# Altium PCB PCB1.PcbDoc
Units mm, origin at the board's own origin, x right, y up, seen from the top; angles counter-clockwise.
Board outline 70 x 50 mm, 4 copper layers (Top Layer, Layer 2, Layer 3, Bottom Layer), stack 1.536 mm thick; 88 components, 67 nets, 367 pads, 54 vias.
Unrouted connection lines stored in the file: 76.
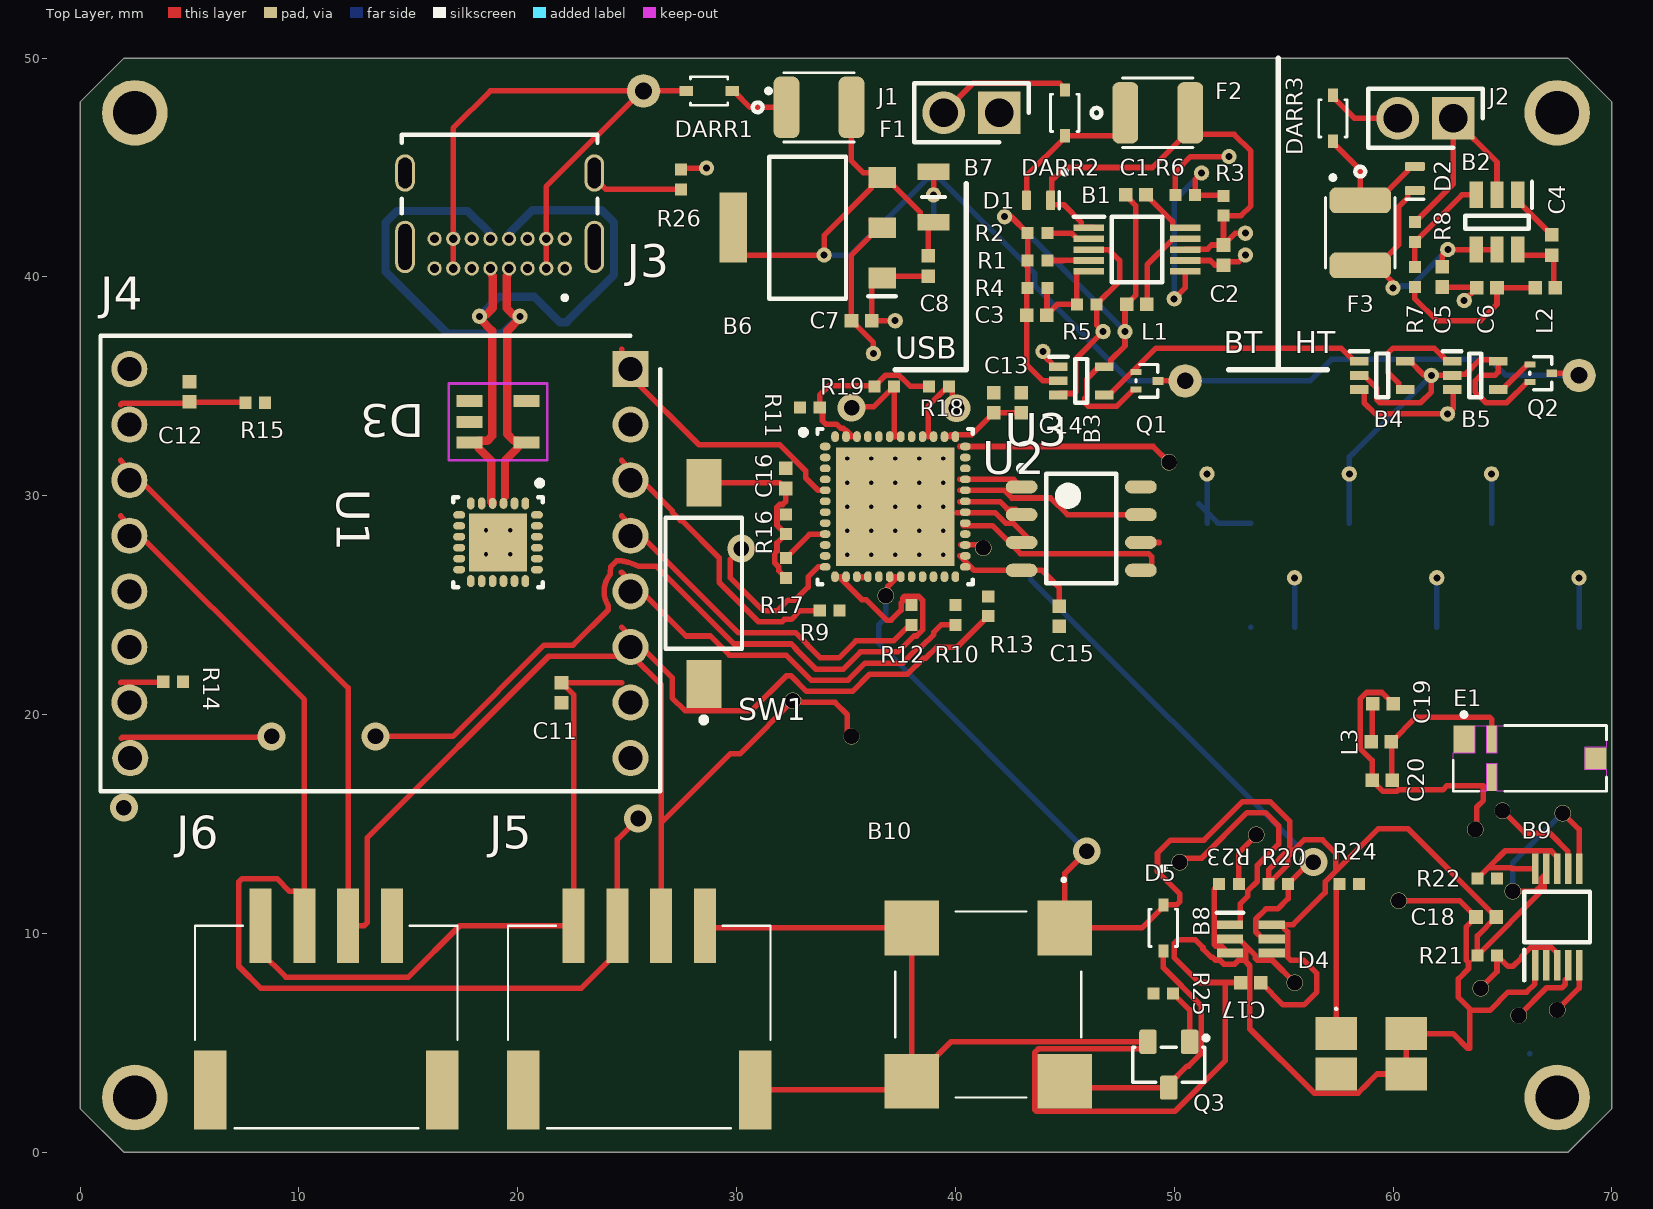
[diagram p0: Top Layer view]
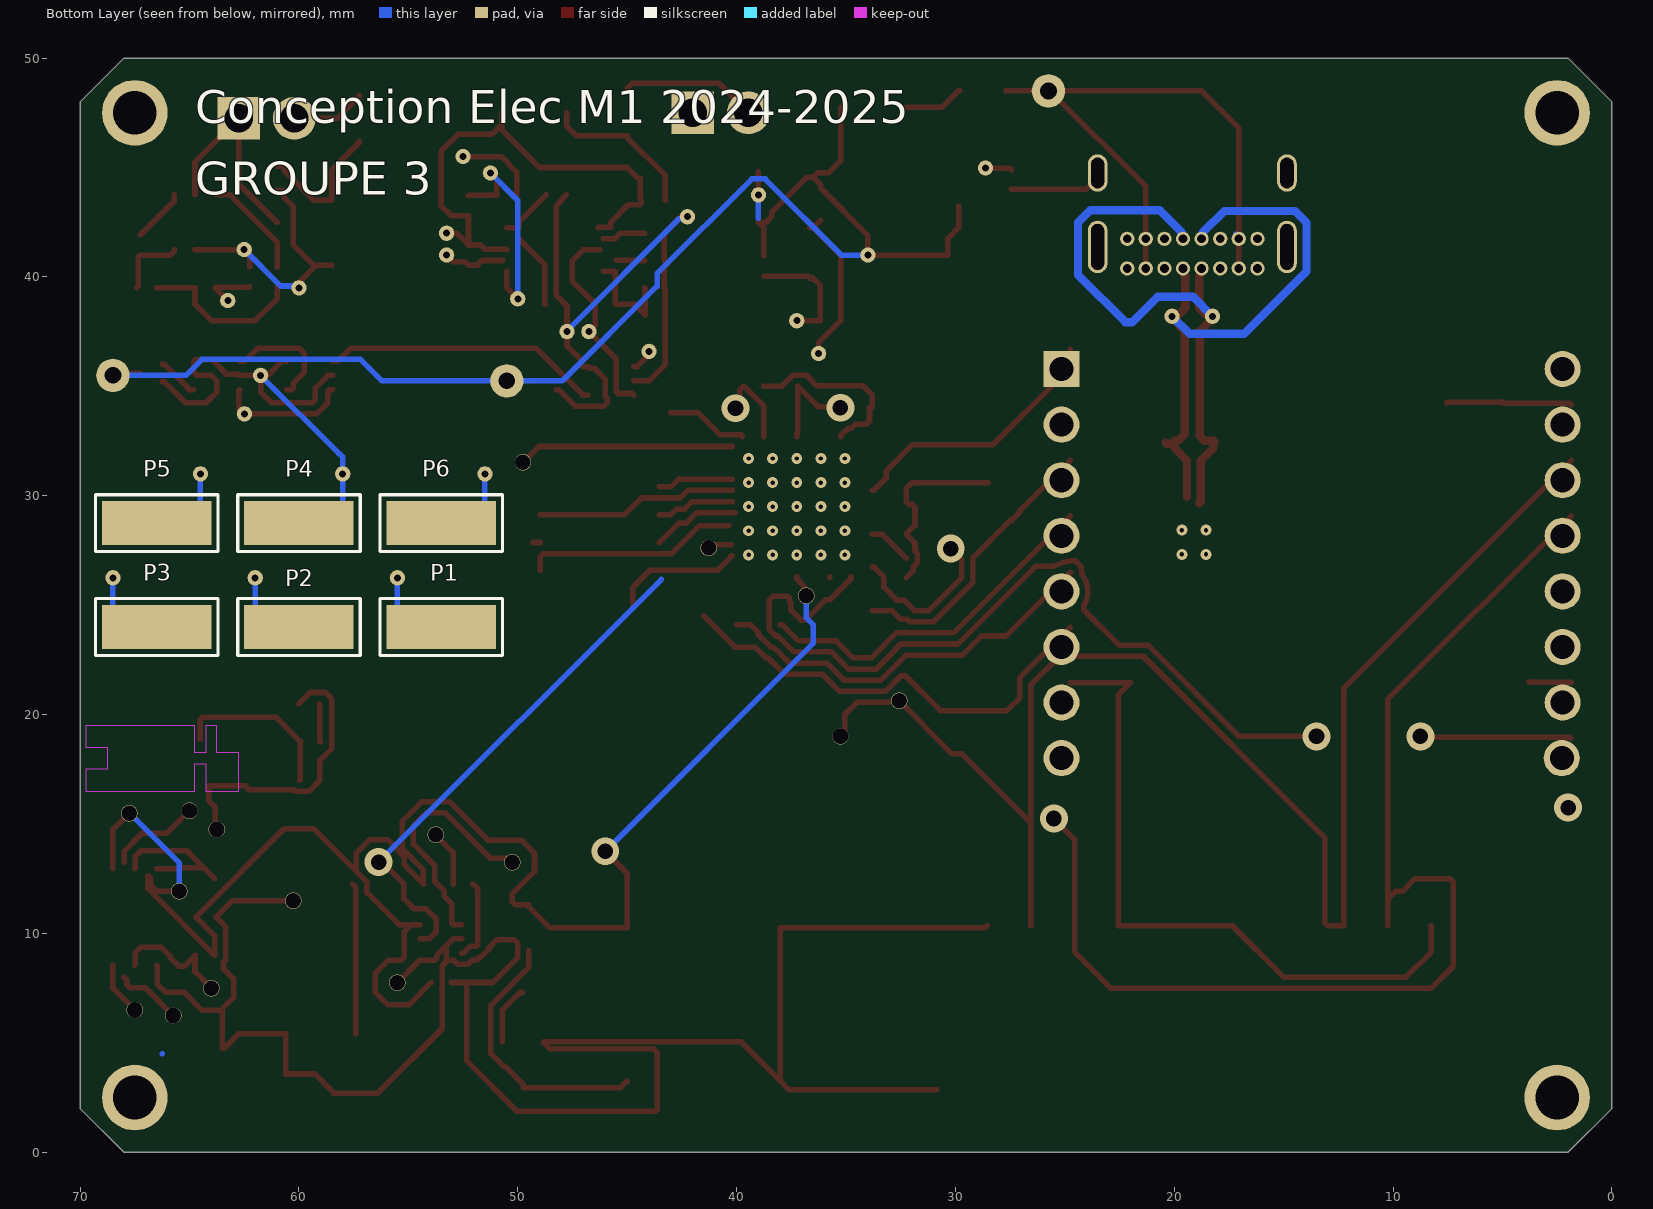
[diagram p1: Bottom Layer view, seen from below]
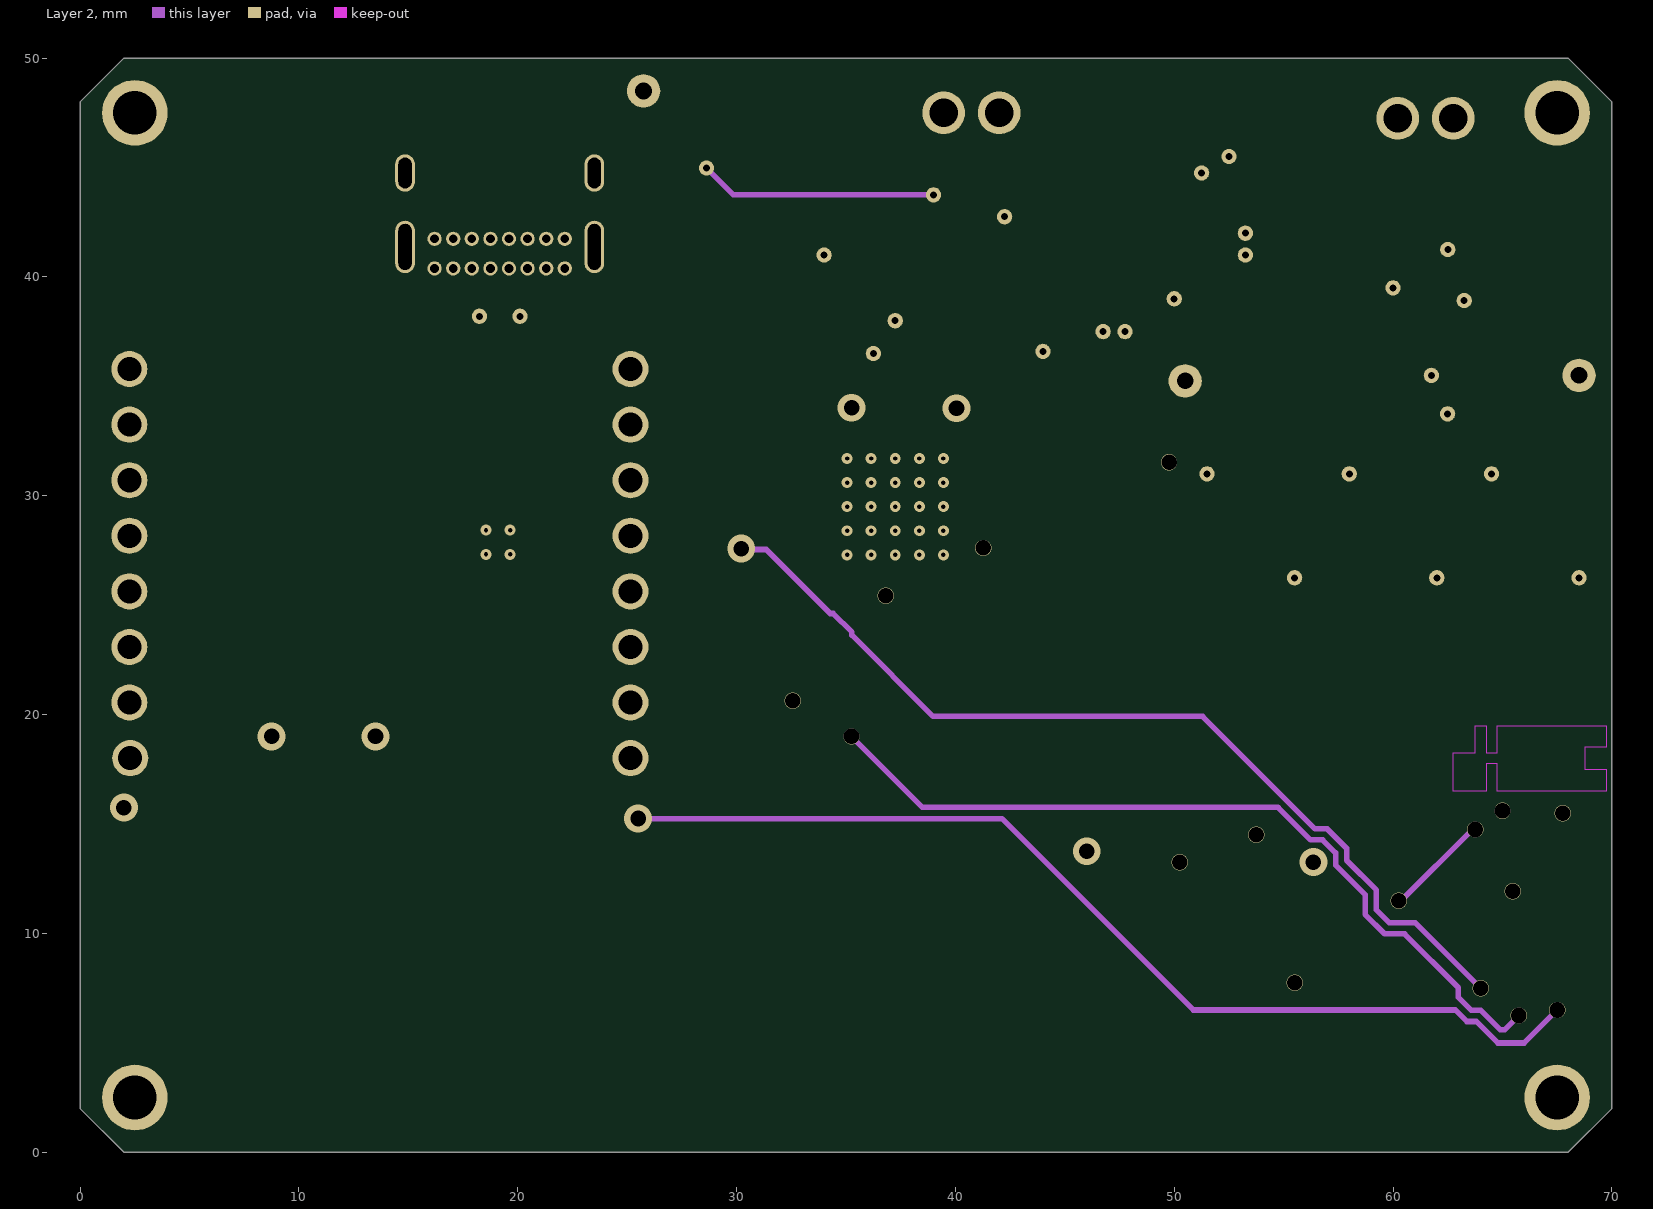
[diagram p2: Layer 2]
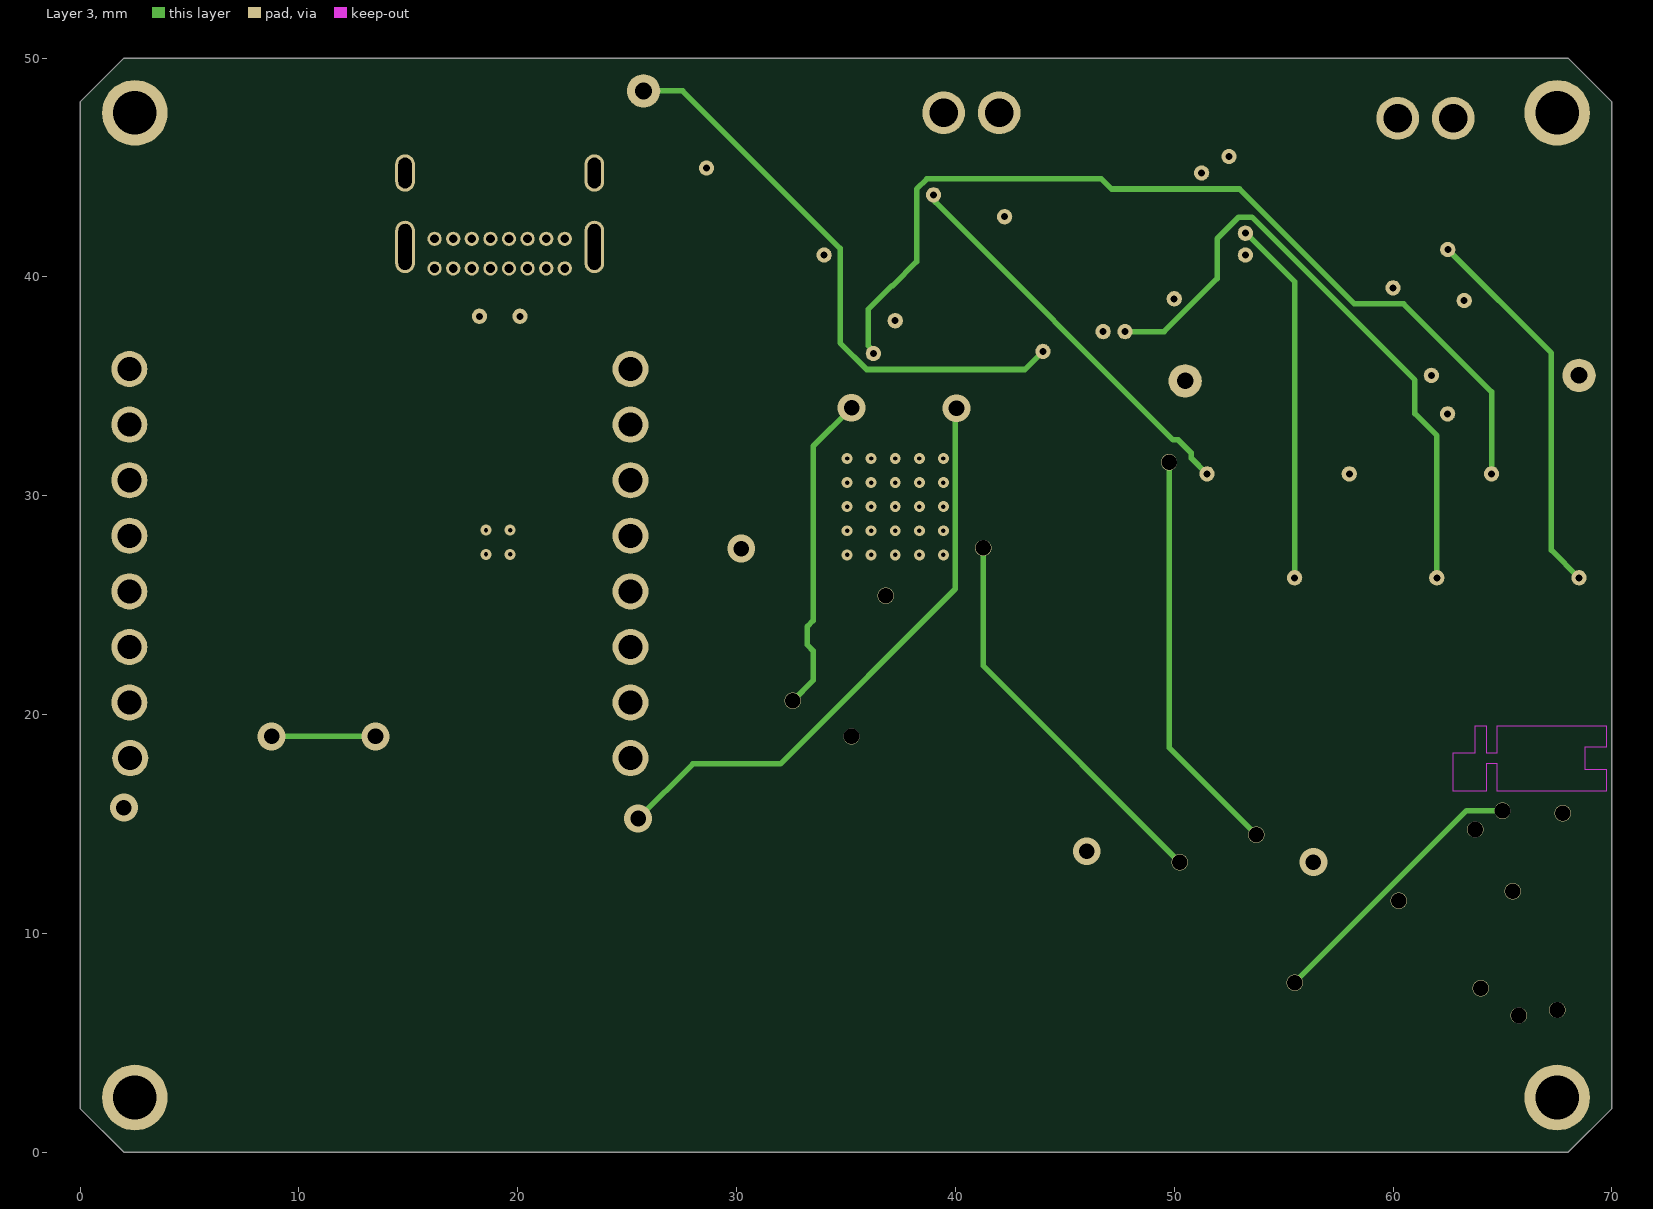
[diagram p3: Layer 3]
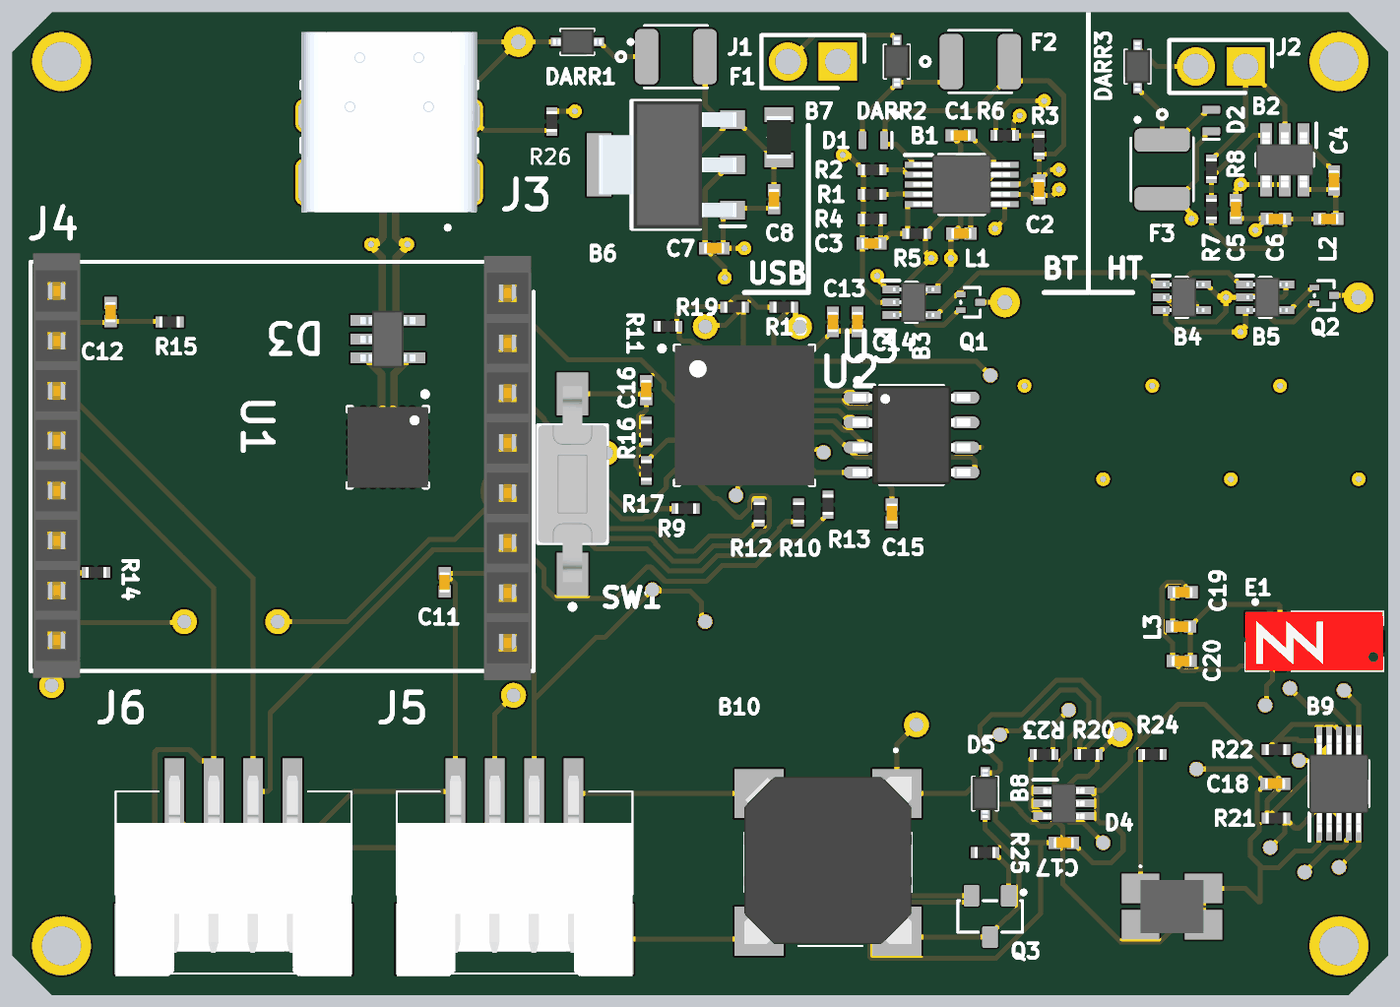
[diagram p4: 3D render of the assembled board from above, using the file's embedded part models]

## Layer stack, top to bottom
Top Solder: solder mask 0.0102, SM-001, Dk 3.5
Top Layer: signal copper 0.018
Dielectric 1: prepreg 0.36, FR-4, Dk 4.8
Layer 2: signal copper 0.035
Dielectric 2: core 0.71, FR-4, Dk 4.8
Layer 3: signal copper 0.035
Dielectric 3: prepreg 0.36, FR-4, Dk 4.8
Bottom Layer: signal copper 0.018
Bottom Solder: solder mask 0.0102, SM-001, Dk 3.5

## Board outline
0,2 2,0 68,0 70,2 70,48 68,50 2,50 0,48

## Design rules (kind name [scope] priority, off if disabled: settings)
Clearance [All] p1: gap=0.254 ignorepadtopadclearanceinfootprint=FALSE except(0: Arc-SMDPad Arc-Hole Track-SMDPad Track-Hole SMDPad-SMDPad SMDPad-Hole THPad-Hole Via-Hole Fill-Hole Poly-Hole Region-Hole Text-Hole)
DiffPairsRouting [All] p1: maxlimit=0.254 minlimit=0.254 mostfreqgap=0.254 toplayer_minwidth=0.381 toplayer_maxwidth=0.381 toplayer_prefwidth=0.381 midlayer1_minwidth=0.381 midlayer1_maxwidth=0.381 midlayer1_prefwidth=0.381 midlayer2_minwidth=0.381 midlayer2_maxwidth=0.381 midlayer2_prefwidth=0.381 bottomlayer_minwidth=0.381 bottomlayer_maxwidth=0.381 bottomlayer_prefwidth=0.381 maxuncoupledlength=12.7
PolygonConnect [All] p1: connectstyle=Relief reliefconductorwidth=0.254 reliefentries=4 polygonreliefangle="90 Angle" airgapwidth=0.254
RoutingVias [All] p1: holewidth=0.711 width=1.27 viastyle="Through Hole" minholewidth=0.711 minwidth=1.27 maxholewidth=0.711 maxwidth=1.27
SolderMaskExpansion [All] p1: expansion=0.102 istentingtop=FALSE
SupplyNets "Schematic Supply Nets_3" [InNet('5V_USB')] p1: voltage=0.000
SupplyNets "Schematic Supply Nets_2" [InNet('3V3_Reg')] p2: voltage=0.000
SupplyNets "Schematic Supply Nets_1" [InNet('Vin_USB')] p3: voltage=0.000
SupplyNets "Schematic Supply Nets" [InNet('GND')] p4: voltage=0.000
Width [All] p1: maxlimit=0.254 minlimit=0.254 preferedwidth=0.254
29 further rules are at their usual default settings.

## Classes and differential pairs
component class IHM: 0.75mm B8 B9 B10 C17 C18 C19 C20 D4 D5 E1 L3 Q3 R20 R21 R22 R23 R24 R25
component class ESP32_PICO_D4: C13 C14 C15 C16 R16 R17 R18 R19 SW1 U2 U3
component class Connecteurs: C11 C12 D3 J3 J4 J5 J6 R9 R10 R11 R12 R13 R14 R15 U1
component class Alimentation.SchDoc: B1 B2 B3 B4 B5 B6 B7 C1 C2 C3 C4 C5 C6 C7 C8 D1 D2 DARR1 DARR2 DARR3 F1 F2 F3 J1 J2 L1 L2 P1 P2 P3 P4 P5 P6 Q1 Q2 R1 R2 R3 R4 R5 R6 R7 R8 R26
differential pair USB: +USB_P -USB_N

## Components (designator, comment, footprint, x,y, rotation, side; value= is the part's Value field where it differs from the comment)
B1 "TPS62056DGSG4" SOP50P490X110-10N 48.3,41.25 r0 top
B2 "LMR50410Y3FQDBVRQ1" SOT95P280X145-6N 64.75,42.5 r270 top
B3 "MC74VHC1GT08DFT2G" SOT65P210X110-5N 45.75,35.25 r0 top
B4 "MC74VHC1GT08DFT2G" SOT65P210X110-5N 59.5,35.5 r0 top
B5 "MC74VHC1GT32DFT1G" SOT65P210X110-5N 63.75,35.5 r0 top
B6 "NCP1117IST33T3G" SOT230P700X180-4N 33.25,42.25 r180 top
B7 "NB12K00103JBB" RESC2212X50N 39,43.65 r90 top
B8 "TMP126DCKR" SOT65P210X110-6N 53.5,9.75 r0 top
B9 "INA237AIDGST" SOP50P490X110-10N 67.5,10.75 r90 top
B10 "CMT-8503-85B-SMT-TR" CMT850385BSMTTR 41.5,6.75 r180 top
C1 "22μF" CAPC1005X06N 48.25,43.75 r180 top
C2 "10μF" CAPC1005X06N 52.25,41 r270 top
C3 "6.8pF" CAPC1005X06N 43.71,38.25 r180 top
C4 "0.1μF" CAPC1005X06N 67.25,41.46 r270 top
C5 "2.2μF" CAPC1005X06N 62.25,40 r270 top
C6 "10μF" CAPC1005X06N 64.29,39.5 r180 top
C7 "10μF" CAPC1005X06N 35.71,38 r0 top
C8 "10μF" CAPC1005X06N 38.75,40.5 r270 top
C11 "0.1µF" CAPC1005X06N 22,21 r270 top
C12 "0.1µF" CAPC1005X06N 5,34.75 r90 top
C13 "10μF" CAPC1005X06N 41.75,34.25 r90 top
C14 "0.1μF" CAPC1005X06N 43,34.25 r90 top
C15 "0.1μF" CAPC1005X06N 44.75,24.5 r90 top
C16 "1μF" CAPC1005X06N 32.25,30.79 r90 top
C17 "0.1 µF" CAPC1005X06N 53.5,7.75 r0 top
C18 "100nF" CAPC1005X06N 64.25,10.75 r180 top
C19 "1.5 pF" CAPC1005X06N 59.54,20.5 r180 top
C20 "1.2 pF" CAPC1005X06N 59.5,17 r0 top
D1 "ESDA25P35-1U1M" STM-QFN1610 43.8,43.5 r180 top
D2 "ESDA25P35-1U1M" STM-QFN1610 61,44.5 r90 top
D3 "824011" 824011 19.1,33.375 r270 top
D4 "598-8610-207F" 5988610207F 59,4.5 r0 top
D5 "SD103AWS-7-F" SD103AWS-7-F 49.5,10.25 r270 top
DARR1 "SD103AWS-7-F" SD103AWS-7-F 28.75,48.5 r180 top
DARR2 "SD103AWS-7-F" SD103AWS-7-F 45,47.5 r90 top
DARR3 "SD103AWS-7-F" SD103AWS-7-F 57.25,47.25 r90 top
E1 "MN03-320" XCVR_NN03-320 66.25,18 r180 top
F1 "MICROSMD200LR-2" FUSC3225X100N 33.765,47.75 r0 top
F2 "MICROSMD200LR-2" FUSC3225X100N 49.25,47.5 r0 top
F3 "MICROSMD200LR-2" FUSC3225X100N 58.5,42.015 r270 top
J1 "61300211121" 61300211121 42,47.5 r180 top
J2 "61300211121" 61300211121 62.75,47.25 r180 top
J3 "Use" USB4085-GF-A 19.175,44.75 r180 top locked
J4 "825433-8" Connect-Mikronus 25.15,35.79 r270 top locked
J5 "114020164" 114020164 25.55,6.55 r0 top
J6 "114020164" 114020164 11.25,6.55 r0 top
L1 "10μH" LQPC1005X06N 45.496,35.956 r180 top
L2 "10μH" LQPC1005X06N 69.754,42.294 r0 top
L3 "1.8 nH" LQPC1005X06N 62.254,21.544 r0 top
P1 "Plage CMS 10x5" "Plage CMS 10x5" 53.5,24 r0 bottom
P2 "Plage CMS 10x5" "Plage CMS 10x5" 60,24 r0 bottom
P3 "Plage CMS 10x5" "Plage CMS 10x5" 66.5,24 r0 bottom
P4 "Plage CMS 10x5" "Plage CMS 10x5" 60,28.75 r0 bottom
P5 "Plage CMS 10x5" "Plage CMS 10x5" 66.5,28.75 r0 bottom
P6 "Plage CMS 10x5" "Plage CMS 10x5" 53.5,28.75 r0 bottom
Q1 "SI3139K-TP" SI3139K-TP 48.75,35.25 r270 top
Q2 "SI3139K-TP" SI3139K-TP 66.75,35.6 r270 top
Q3 "SS8050-G" SS8050-G 49.75,4 r180 top
R1 "1MΩ" RESC1005X06N 43.75,40.75 r0 top
R2 "1MΩ" RESC1005X06N 43.75,42 r0 top
R3 "10kΩ" RESC1005X06N 52.25,43.25 r90 top
R4 "820KΩ" RESC1005X06N 43.75,39.5 r0 top
R5 "91KΩ" RESC1005X06N 46,38.75 r0 top
R6 "10kΩ" RESC1005X06N 50.5,43.75 r180 top
R7 "88.7KΩ" RESC1005X06N 61,40 r90 top
R8 "22.1KΩ" RESC1005X06N 61,42.05 r90 top
R9 "100Ω" RESC1005X06N 34.25,24.75 r0 top
R10 "100Ω" RESC1005X06N 40,24.55 r90 top
R11 "2.4kΩ" RESC1005X06N 33.35,34.025 r0 top
R12 "100Ω" RESC1005X06N 38,24.55 r90 top
R13 "100Ω" RESC1005X06N 41.5,24.95 r90 top
R14 "2.4kΩ" RESC1005X06N 4.25,21.5 r180 top
R15 "2.4kΩ" RESC1005X06N 8,34.25 r180 top
R16 "10kΩ" RESC1005X06N 32.25,28.7 r90 top
R17 "0Ω" RESC1005X06N 32.25,26.7 r90 top
R18 "2.4kΩ" RESC1005X06N 39.25,35 r180 top
R19 "2.4kΩ" RESC1005X06N 36.75,35 r180 top
R20 "10K" RESC1005X06N 54.75,12.25 r180 top
R21 "10K" RESC1005X06N 64.3,9 r180 top
R22 "4k" RESC1005X06N 64.3,12.5 r180 top
R23 "10k" RESC1005X06N 52.5,12.25 r0 top
R24 "180" RESC1005X06N 58,12.25 r0 top
R25 "180" RESC1005X06N 49.5,7.25 r180 top
R26 "10 kΩ" RESC1005X06N 27.45,44.45 r270 top
SW1 "FSMSM" TECO-FSMSM-2_V 28.5,26 r90 top
U1 "CP2104-F03-GM" PQFN50P400X400X80_HS-25N 19.1,27.875 r270 top
U2 "ESP32-PICO-D4" PQFN50P700X700X104_HS-49N 37.25,29.5 r0 top
U3 "IS66WVS1M8BLL-104NLI" SOIC127P600X175-8N 45.75,28.5 r0 top

## Footprints (in the part's own frame and the unit in brackets; to place one, negate y for a bottom-side part, rotate by r counter-clockwise, add the part's x,y. Pads: shape width x height; smd on the part's side, far side on the other; paste and mask are expansions set on the pad)
824011 [mil] "Suppresseurs ESD / diodes TVS WE-TVS High Speed 5uA 5VDC 2+1"
  rect 21.65x47.24 smd: 1(-37.4,-51.18) 2(0,-51.18) 3(37.4,-51.18) 4(37.4,51.18) 5(-37.5,51)
  Top Layer keep-out lines w5: 68.9,-88.58 -68.9,-88.58 -68.9,88.58 68.9,88.58 68.9,-88.58
  body extent -57,-55 57,55, height 57
114020164 [mm]
  rect 1x3.4 smd: 1(-3,3.8) 2(-1,3.8) 3(1,3.8) 4(3,3.8)
  rect 1.5x3.6 smd: MP1(-5.3,-3.7) MP2(5.3,-3.7)
  silkscreen extent -6,-5.45 6,3.8, body extent -6,-5.59 6,4.6, height 5.2
5988610207F [mm]
  rect 1.9x1.5 smd: 1(-1.6,0.925) 2(1.6,0.925) 3(-1.6,-0.925) 4(1.6,-0.925)
  silkscreen extent -1.65,2 -1.55,2.1, body extent -1.6,-1.35 1.6,1.35, height 0.9
61300211121 [mm] "Embases et logements de câbles WR-PHD 2.54mm 2Pin T HT Header"
  rect 1.95x1.95 / inner round 1.95 / far side rect 1.95x1.95 hole 1.3: 1(0,0)
  round 1.95 hole 1.3: 2(2.54,0)
  silkscreen extent -1.35,-1.35 3.89,1.35
CAPC1005X06N [mm] "Chip Capacitor, 2-Leads, Body 1,00x0,50mm, IPC Medium Density"
  rect 0.62x0.62 smd: 1(-0.46,0) 2(0.46,0)
  body extent -0.53,-0.28 0.53,0.28, height 0.55
CMT850385BSMTTR [mm]
  rect 2.5x2.5 smd: 1(-3.5,-3.5) 4(-3.5,3.5) MP1(3.5,-3.5) MP2(3.5,3.5)
  silkscreen extent -4.25,-5.75 4.25,4.25, body extent -4.31,-4.35 4.31,4.15, height 3
Connect-Mikronus [mm]
  rect 1.65x1.65 / inner round 1.65 / far side rect 1.65x1.65 hole 1.1: 1(0,0)
  round 1.65 hole 1.1: 2(2.54,0) 3(5.08,0) 4(7.62,0) 5(10.16,0) 6(12.7,0) 7(15.24,0) 8(17.78,0) 9(17.78,-22.86) 10(15.24,-22.9) 11(12.7,-22.9) 12(10.16,-22.9) 13(7.62,-22.9) 14(5.08,-22.9) 15(2.54,-22.9) 16(0,-22.9)
  silkscreen extent -1.52,-24.22 19.3,1.37, body extent -1.95,-24.1 19.78,1.25, height 8.5
FUSC3225X100N [mm]
  rrect50% 1.18x2.81 smd: 1(-1.485,0) 2(1.485,0)
  silkscreen extent -3.02,-1.59 1.61,1.59
LQPC1005X06N [mm]
  rect 0.62x0.62 smd: 1(-3.254,-2.794) 2(-2.334,-2.794)
  body extent -3.32,-3.07 -2.27,-2.52, height 0.55
"Plage CMS 10x5" [mm] "Plage CMS 10x5"
  rect 5x2 smd paste-1 mask+0.15: 1(0,0)
  silkscreen extent -2.8,-1.3 2.8,1.3
PQFN50P400X400X80_HS-25N [mm] "PQFN, 24-Leads, Body 4,00x4,00mm, Pitch 0,50mm, Thermal Pad 2,65x2,65mm, IPC Medium Density"
  oval 0.55x0.35 smd: 1(-1.775,1.25) 2(-1.775,0.75) 5(-1.775,-0.75) 6(-1.775,-1.25) 13(1.775,-1.25) 14(1.775,-0.75) 15(1.775,-0.25) 16(1.775,0.25) 17(1.775,0.75) 18(1.775,1.25)
  oval 0.5x0.35 smd: 3(-1.775,0.25) 4(-1.775,-0.25)
  oval 0.35x0.55 smd: 7(-1.25,-1.775) 8(-0.75,-1.775) 9(-0.25,-1.775) 10(0.25,-1.775) 11(0.75,-1.775) 12(1.25,-1.775) 19(1.25,1.775) 20(0.75,1.775) 21(0.25,1.775) 22(-0.25,1.775) 23(-0.75,1.775) 24(-1.25,1.775)
  rect 2.65x2.65 smd: 25(0,0)
  silkscreen extent -2.82,-2.05 2.05,2.05, body extent -2.05,-2.05 2.05,2.05, height 0.8
PQFN50P700X700X104_HS-49N [mm] "PQFN, 48-Leads, Body 7,00x7,00mm, Pitch 0,50mm, Thermal Pad 5,40x5,40mm, IPC Medium Density"
  oval 0.5x0.35 smd: 1(-3.2,2.75) 2(-3.2,2.25) 3(-3.2,1.75) 4(-3.2,1.25) 5(-3.2,0.75) 6(-3.2,0.25) 7(-3.2,-0.25) 8(-3.2,-0.75) 9(-3.2,-1.25) 10(-3.2,-1.75) 11(-3.2,-2.25) 12(-3.2,-2.75) 25(3.2,-2.75) 26(3.2,-2.25) 27(3.2,-1.75) 28(3.2,-1.25) 29(3.2,-0.75) 30(3.2,-0.25) 31(3.2,0.25) 32(3.2,0.75) 33(3.2,1.25) 34(3.2,1.75) 35(3.2,2.25) 36(3.2,2.75)
  oval 0.35x0.5 smd: 13(-2.75,-3.2) 14(-2.25,-3.2) 15(-1.75,-3.2) 16(-1.25,-3.2) 17(-0.75,-3.2) 18(-0.25,-3.2) 19(0.25,-3.2) 20(0.75,-3.2) 21(1.25,-3.2) 22(1.75,-3.2) 23(2.25,-3.2) 24(2.75,-3.2) 37(2.75,3.2) 38(2.25,3.2) 39(1.75,3.2) 40(1.25,3.2) 41(0.75,3.2) 42(0.25,3.2) 43(-0.25,3.2) 44(-0.75,3.2) 45(-1.25,3.2) 46(-1.75,3.2) 47(-2.25,3.2) 48(-2.75,3.2)
  rect 5.4x5.4 smd: 49(0,0)
  silkscreen extent -4.32,-3.55 3.55,3.55, body extent -3.55,-3.55 3.55,3.55, height 1.04
RESC1005X06N [mm] "Chip Resistor, 2-Leads, Body 1,00x0,50mm, IPC Medium Density"
  rect 0.55x0.55 smd: 1(-0.45,0) 2(0.45,0)
  body extent -0.53,-0.28 0.53,0.28, height 0.55
RESC2212X50N [mm]
  rect 0.75x1.45 smd: 1(-1.15,0) 2(1.15,0)
  silkscreen extent 0,-0.53 0,0.53, body extent -1.07,-0.63 1.07,0.63, height 0.5
SD103AWS-7-F [mm]
  rect 0.6x0.46 smd: 1(-1.05,0) 2(1.05,0)
  silkscreen extent -2.81,-0.65 0.85,0.65, body extent -1.25,-0.65 1.25,0.65, height 1.2
SI3139K-TP [mm] "MOSFET P-Channel MOSFET"
  rect 0.28x0.5 smd paste+0 mask+0.075: 1(-0.4,-0.5) 2(0.4,-0.5)
  rect 0.36x0.5 smd paste+0 mask+0.075: 3(0,0.5)
  silkscreen extent -0.75,-0.5 0.75,0.5, body extent -0.6,-0.6 0.6,0.6, height 0.55
SOIC127P600X175-8N [mm] "SOIC, 8-Leads, Body 4,90x3,90mm, Pitch 1,27mm, IPC Medium Density"
  oval 1.45x0.6 smd: 1(-2.725,1.905) 2(-2.725,0.635) 3(-2.725,-0.635) 4(-2.725,-1.905) 5(2.725,-1.905) 6(2.725,-0.635) 7(2.725,0.635) 8(2.725,1.905)
  silkscreen extent -2.85,-2.5 1.6,2.88, body extent -3,-2.5 3,2.5, height 1.75
SOP50P490X110-10N [mm]
  rect 1.4x0.3 smd: 1(-2.2,1) 2(-2.2,0.5) 3(-2.2,0) 4(-2.2,-0.5) 5(-2.2,-1) 6(2.2,-1) 7(2.2,-0.5) 8(2.2,0) 9(2.2,0.5) 10(2.2,1)
  silkscreen extent -2.9,-1.5 1.15,1.5, body extent -2.46,-1.5 2.46,1.5, height 1.06
SOT65P210X110-5N [mm]
  rect 0.85x0.4 smd: 1(-1.05,0.65) 2(-1.05,0) 3(-1.05,-0.65) 4(1.05,-0.65) 5(1.05,0.65)
  silkscreen extent -1.48,-1 0.28,1.1, body extent -0.95,-1 1.15,1, height 1.1
SOT65P210X110-6N [mm]
  rect 1.2x0.4 smd: 1(-0.95,0.65) 2(-0.95,0) 3(-0.95,-0.65) 4(0.95,-0.65) 5(0.95,0) 6(0.95,0.65)
  silkscreen extent -1.55,1.2 -0.35,1.2, body extent -1.05,-1 1.05,1, height 1
SOT95P280X145-6N [mm]
  rect 1.2x0.6 smd: 1(-1.25,0.95) 2(-1.25,0) 3(-1.25,-0.95) 4(1.25,-0.95) 5(1.25,0) 6(1.25,0.95)
  silkscreen extent -1.85,-1.45 0.3,1.6, body extent -1.4,-1.45 1.4,1.45, height 1.2
SOT230P700X180-4N [mm]
  rect 1.25x0.95 smd: 1(-3.4,2.3) 2(-3.4,0) 3(-3.4,-2.3)
  rect 1.25x3.2 smd: 4(3.4,0)
  silkscreen extent -4.03,-3.25 1.75,3.25, body extent -3.6,-3.25 3.4,3.25, height 1.8
SS8050-G [mm]
  rrect25% 0.8x1.1 smd paste+0 mask+0.075: 1(-0.95,-1.05) 2(0.95,-1.05) 3(0,1.05)
  silkscreen extent -1.77,-1.3 1.65,0.8, body extent -1.5,-1.3 1.5,1.3, height 1.1
STM-QFN1610 [mm] "SMD, 2-Leads, Body 1.6x1mm"
  rrect25% 0.4x0.9 smd: 1(-0.55,0) 2(0.55,0)
  silkscreen extent -0.95,-0.4 -0.95,0.4, body extent -0.8,-0.5 0.8,0.5, height 0.6
TECO-FSMSM-2_V [mm] "SMD, 2-Leads, Body 6x3.5mm, Pitch 9.19mm"
  rect 2.2x1.6 smd: 1(-4.595,0)
  rect 2.18x1.6 smd: 2(4.595,0)
  silkscreen extent -6.37,-1.75 3,1.75, body extent -4.98,-1.75 4.98,1.75, height 4.4
USB4085-GF-A [mm]
  round 0.65 hole 0.4: A1(-2.975,4.36) A4(-2.125,4.36) A5(-1.275,4.36) A6(-0.425,4.36) A7(0.425,4.36) A8(1.275,4.36) A9(2.125,4.36) A12(2.975,4.36) B1(2.975,3.01) B4(2.125,3.01) B5(1.275,3.01) B6(0.425,3.01) B7(-0.425,3.01) B8(-1.275,3.01) B9(-2.125,3.01) B12(-2.975,3.01)
  oval 0.9x1.7 hole 0.6 slot 1.4 at 90 deg: S1(-4.325,0) S2(4.325,0)
  oval 0.9x2.4 hole 0.6 slot 2.1 at 90 deg: S3(-4.325,3.38) S4(4.325,3.38)
  silkscreen extent -4.47,-1.74 4.47,5.8, body extent -4.47,-4.25 4.47,4.92, height 3.46
XCVR_NN03-320 [mm]
  rect 1x1 smd: 1(-3,0)
  rect 0.5x1.25 smd: 2(1.75,-0.875) 3(1.75,0.875)
  rect 1x1.25 smd: 4(3,-0.875)
  Keep-Out Layer region: 3.5,-0.25 2.5,-0.25 2.5,-1.5 2,-1.5 2,-0.25 1.5,-0.25 1.5,-1.5 -3.5,-1.5 -3.5,-0.5 -2.5,-0.5 -2.5,0.5 -3.5,0.5 -3.5,1.5 1.5,1.5 1.5,0.25 2,0.25 2,1.5 3.5,1.5
  silkscreen extent -3.5,-2.1 3.5,1.5, body extent -3.5,-1.5 3.5,1.5, height 2.02

## Part data
B1: "TEXAS INSTRUMENTS - TPS62056DGSG4 - Synchronous Buck (Step Down) Switching Regulator, Fixed, 2.7V-10Vin, 3.3V/0.8A out, 850kHz, VSSOP-10", Manufacturer_Name="Texas Instruments", Mouser Part Number=595-TPS62056DGSG4, Manufacturer_Part_Number=TPS62056DGSG4
B2: "Régulateurs de tension de commutation Automotive qualified SIMPLE SWITCHER 4-V to 36-V, 1-A synchronous step-down converter 6-SOT-23 -40 to 150", Manufacturer_Name="Texas Instruments", Mouser Part Number=595-R50410Y3FQDBVRQ1, Manufacturer_Part_Number=LMR50410Y3FQDBVRQ1
B3 B4: "Single 2-Input AND Gate, TTL Level", Manufacturer_Name=onsemi, Manufacturer_Part_Number=MC74VHC1GT08DFT2G
B5: "Single 2-Input OR Gate, TTL Level", Manufacturer_Name=onsemi, Mouser Part Number=863-C74VHC1GT32DFT1G, Manufacturer_Part_Number=MC74VHC1GT32DFT1G
B6: "Linear Voltage Regulator IC Positive Fixed 1 Output 1A SOT-223", Parameter 1=onsemi, Parameter 2=NCP1117IST33T3G, Parameter 3=863-NCP1117IST33T3G
B7: "NTC SMD Thermistor, NB12K, 10K, 5% AVX 10k 0805 Protection NTC Thermistor, 5s, 2 x 1.25 x 1.3mm", Manufacturer_Name="Kyocera AVX", Mouser Part Number=581-NB12K00103JBB, Arrow Part Number=NB12K00103JBB, Arrow Price/Stock=https://www.arrow.com/en/products/nb12k00103jbb/avx, Datasheet Link=https://datasheet.datasheetarchive.com/originals/distributors/Datasheets-DGA6/551314.pdf, Geometry.Height=0.5mm, Manufacturer_Part_Number=NB12K00103JBB, Mouser Price/Stock=https://www.mouser.co.uk/ProductDetail/AVX/NB12K00103JBB/?qs=4%252B6%252BTdINQeDPvI%252BQUQjJ3Q%3D%3D
B8: "Board Mount Temperature Sensors +/-0.25 C SPI temperature sensor with 175 C operation, CRC and slew-rate alert", Manufacturer_Name="Texas Instruments", Mouser Part Number=595-TMP126DCKR, Manufacturer_Part_Number=TMP126DCKR
B9: "Current Sense Amplifiers 85-V, 16-bit, I2C output current/voltage/power monitor with alert 10-VSSOP -40 to 125", Manufacturer_Name="Texas Instruments", Mouser Part Number=595-INA237AIDGST, Manufacturer_Part_Number=INA237AIDGST
B10: "Speakers & Transducers buzzer, 8.5 mm, 3 mm deep, M, 3.6 V, 85 dB, Surface Mount (SMT), Audio Transducer", Manufacturer_Name="Same Sky", Mouser Part Number=490-CMT-850385BSMTTR, Manufacturer_Part_Number=CMT-8503-85B-SMT-TR
C1 C2 C3 C4 C5 C6 C7 C8 C11 C12 C13 C14 C15 C16 C17 C18 C19 C20: library part Capacitor
D1 D2: library part CMP-004-00023-3, "TVS DIODE 22V 41V 1610", Case/Package="QFN1610 (0603)", Max Surge Current=35A, Peak Inverse Voltage=23.3V, Mounting Technology=SMT, Pins=2, RoHS Compliant=Yes
D3: "TVS Diode Array WE-TVS, High Speed Series  - Low capazity - No leakage current - Low clamping voltage - high ESD voltage protection  -- USB 1.0 - 2.0"
D4: "Standard LEDs - SMD Red/Green WC 80/50mcd 645/570nm", Manufacturer_Name=Dialight, Mouser Part Number=645-598-8610-207F, Arrow Part Number=598-8610-207F, Arrow Price/Stock=https://www.arrow.com/en/products/598-8610-207f/dialight?region=nac, Datasheet Link=https://media.digikey.com/pdf/Data%20Sheets/Dialight%20PDFs/598%20Series%201210%20Pkg%20Bi-Color.pdf, Geometry.Height=0.8mm, Manufacturer_Part_Number=598-8610-207F, Mouser Price/Stock=https://www.mouser.co.uk/ProductDetail/Dialight/598-8610-207F?qs=7JStj%2FjQ2SFuCjosqwklHQ%3D%3D
D5 DARR1 DARR2 DARR3: "Diode Array 3 Independent Schottky 40V 175mA Surface Mount 6-TSSOP, SC-88, SOT-363"
E1: library part NN03-320, "Dual port antenna booster for GNSS, Bluetooth, 5G and UWB (1561 - 1606MHz, 2400 - 2500MHz, 3400 - 3800MHz, 3100 - 4800MHz and 6000 - 10600 MHz), signal booster", Manufacturer_Name=Ignion, Mouser Part Number=128-NN03-320, Manufacturer_Part_Number=NN03-320
F1 F2 F3: library part CMP-011-000001-1, "Polymeric PTC Resettable Fuse 6V 2A Ih Surface Mount 1210 _3225 Metric_, Concave", Package="1210 TE Connectivity", Availability=Unavailable, Component Type=Standard, Design Item ID=MICROSMD200LR-2, MF="Littelfuse Inc.", MP=MICROSMD200LR-2, Pin Count=2, Price=None, SnapEDA_Link=https://www.snapeda.com/parts/MICROSMD200LR-2/Littelfuse%20Inc./view-part/2874530/?ref=snap, Source=SnapEDAsch.SchLib
J1 J2: "WURTH ELEKTRONIK - 61300211121 - HEADER, 2.54MM, PIN, THT, VERTICAL, 2WAY"
J3: library part USB4085-GF-A, "Connecteurs USB USB Type C, 2.0, Rec, TH , G/F, RA , Top Mnt, T & R"
J4: library part Connect-Mikrobus, "Headers & Wire Housings 8P double for connection mikrobus", Manufacturer_Name="TE Connectivity", Mouser Part Number=571-825433-8, Manufacturer_Part_Number=825433-8
J5 J6: "Seeed Studio Accessories Grove Female Header - SMD-4P-2.0mm-90D-20Pcs", Manufacturer_Name="Seeed Studio", Mouser Part Number=713-114020164, Manufacturer_Part_Number=114020164
L1 L2 L3: library part Bobine
P1 P2 P3 P4 P5 P6: "Plage de report CMS 10x5mm", Footprint_statut=ok, PN=L30
Q1 Q2: "MOSFET P-Channel MOSFET"
Q3: "Bipolar Transistors - BJT NPN TRANSISTOR 1.5A 40V"
R1 R2 R3 R4 R5 R6 R7 R8 R9 R10 R11 R12 R13 R14 R15 R16 R17 R18 R19 R20 R21 R22 R23 R24 R25 R26: library part Resistor
SW1: library part CMP-2000-07511-1, "FSMSM Push Button Switch, 50 mA, -35 to 85 degC, 2-Pin SMD, RoHS, Bulk", Case\/Package=SMD/SMT, Contact Current Rating=50mA, Contact Resistance=100mOhm, Manufacturer="TE Connectivity", Max Operating Temperature=85degC, Max Voltage Rating (DC)=12V, Min Operating Temperature=-35degC, Operating Force=180gf, Package Description="2-Pin Surface Mount Device, Body 6 x 3.5 mm, Pitch 9.19 mm", Package Quantity=1000, Voltage Rating (DC)=24V, Actuator Length=1.07mm, Actuator Material=Polyamide, Contact Material=Brass, Contact Plating=Silver, Current Rating=50mA, Datasheet URL=http://www.te.com/commerce/DocumentDelivery/DDEController?Action=showdoc&DocId=Customer+Drawing%7F1437566-3%7FC2%7Fpdf%7FEnglish%7FENG_CD_1437566-3_C2_1437566_3_1_c.dwg.pdf%7F1437566-3, Datasheet Version="Rev. C2, 08/2014", Electrical Life=20000Cycles, ELV=Compliant, Illumination Type=Illuminated, Lead Free=LeadFree, Manufacturer URL=http://www.te.com/, Mechanical Life=20000Cycles, Mount=SurfaceMount, Mounting Technology=SurfaceMount, Orientation=Straight, Package Reference=FSMSM, Packaging=LoosePiece, REACH SVHC=Unknown, RoHSCompliant=true, Switch Travel=0.25mm, Termination=GullWing, Throw Configuration=SPST
U1: library part USBBridge, "USB Bridge, USB to UART USB 2.0 UART Interface 24-QFN (4x4)", Manufacturer 1="Silicon Labs", Manufacturer Part Number 1=CP2104-F03-GM, Supplier 1="Arrow Electronics", Supplier Part Number 1=CP2104-F03-GM
U2: library part ESP32, "Système RF sur puce - SoC SIP module ESP32 with 4MByte Flash, Dual Core MCU, Wi-Fi & Bluetooth Combo, LGA48-pin, 7*7mm", Manufacturer 1="Espressif Systems", Supplier Part Number 1=1904-1029-1-ND, Manufacturer Part Number 1=ESP32-PICO-D4, Supplier 1=Digi-Key
U3: library part SRAM, "SRAM 8Mb, SerialRAM, 2.7V-3.6V, 104MHz, 8 pin SOIC 150 mil, RoHS", Manufacturer 1=ISSI, Supplier Part Number 1=706-IS66WVS1M8BLL-104NLI-ND, Manufactuer Part Number 1=IS66WVS1M8BLL-104NLI, Supplier 1=Digi-Key

## Free pads (board coordinates)
  round 3 hole 2: 19(2.5,2.5) 19(2.5,47.5) 19(67.5,2.5) 19(67.5,47.5)
  round 1.524 hole 0.762: 20(25.75,48.5) 27(50.5,35.25) 28(68.5,35.5)
  round 0.7 hole 0.32: 26(18.25,38.2) 26(20.1,38.2) 26(28.625,44.975) 26(34,41) 26(36.25,36.5) 26(37.25,38) 26(39,43.75) 26(42.25,42.75) 26(44,36.597) 26(46.75,37.5) 26(47.75,37.5) 26(50,39) 26(51.25,44.75) 26(51.5,31) 26(52.5,45.5) 26(53.25,41) 26(53.25,42) 26(55.5,26.25) 26(58,31) 26(60,39.5) 26(61.75,35.5) 26(62,26.25) 26(62.492,33.742) 26(62.5,41.25) 26(63.25,38.92) 26(64.5,31) 26(68.5,26.25)

## Via types
v1: diameter 0.5, hole 0.2, Top Layer to Bottom Layer, 29 vias
v2: diameter 0.75, hole 0.711, Top Layer to Bottom Layer, 16 vias
v3: diameter 1.27, hole 0.711, Top Layer to Bottom Layer, 9 vias

## Nets (pads, with @x,y where several pads share a name; then routed paths per layer and width w, separated by ;. In a path a pad name is that pad's centre, name@x,y a point inside that pad or via, vN(x,y) a via of type N, cw(c..) or ccw(c..) an arc to the next point about the centre after c; other vN are vias at no path point)
3V3_Reg: B8.6 B9.6 B9.9 B10.1 C11.1 C13.1 C14.1 C17.2 C18.1 D5.1 J4.7 J5.1 J6.1 R11.2 R16.2 R18.2 R19.2 R20.2 R21.2 R22.1 U2.1 U2.3 U2.4 U2.19 U2.37 U2.43 U2.46 | length 125.8
  Top Layer w0.254: J6.1 8.25,9.15 9.4,8 15,8 17.35,10.35 J5.1 22.55,20.91 C11.1 24.75,21.46 ; R11.2 33.8,34.6 34.234,35.034 36.266,35.034 R19.2 36.808,35.508 37.41,35.508 37.516,35.402 37.536,35.402 37.938,35 R18.2@38.75,35 ; R11.2@33.926,34.025 33.926,33.424 34.075,33.275 34.564,33.275 34.762,33.077 34.875,33.077 34.95,33.002 34.997,33.002 35.25,32.749 35.25,32.7 ; v2(36.818,25.424) 36.913,25.519 36.913,25.862 37.25,26.199 37.25,26.3 ; 39.75,32.7 39.75,32.749 39.794,32.793 40.753,32.793 C13.1 C14.1 ; v3(46,13.75) 45,12.75 B10.1 48.52,10.25 49.5,11.23 D5.1 50.111,11.3 50.26,11.449 50.26,11.803 49.234,12.829 49.234,13.671 49.829,14.266 51.361,14.266 53.119,16.024 54.381,16.024 55.274,15.131 55.274,13.869 54.311,12.906 R20.2@54.311,12.261 ; C17.2 54.976,6.734 55.921,6.734 56.516,7.329 56.516,8.171 55.921,8.766 55.326,8.766 55.177,8.915 55.177,10.073 B8.6@54.85,10.4 ; R20.2 R20.2@54.311,12.261 ; B8.6 B8.6@54.85,10.4 ; v2(65.461,11.934) 66.514,11.934 66.777,12.197 66.777,12.509 66.898,12.629 66.898,12.048 R21.2 63.85,9.89 C18.1 60.67,14.79 59.329,14.79 57.375,12.836 ; v2(67.75,15.5) 68.5,14.75 B9.6 ; R20.2@54.311,12.261 55.193,13.143 55.193,13.528 55.939,14.273 56.78,14.273 57.375,13.678 57.375,12.836 ; B8.6@54.85,10.4 55.431,10.4 56.892,11.861 56.892,12.353 57.375,12.836
  Bottom Layer w0.254: v2(36.818,25.424) 36.818,24.429 36.5,24.111 36.5,23.25 v3(46,13.75) ; v2(65.461,11.934) 65.461,13.211 v2(67.75,15.5)
5V_BT: B3.2 B3.5 C1.2 C3.2 L1.2 P2.1 pad.26@42.25,42.75 pad.26@47.75,37.5 pad.26@62,26.25 Q1.2 R1.1 R2.1 R4.1 | length 61.6
  Top Layer w0.254: pad.26@42.25,42.75 42.55,42.75 R2.1 R1.1 ; R1.1@43.15,40.6 43.3,40.45 R4.1 43.25,39.45 C3.2 43.25,36 44,35.25 B3.2 ; C1.2 47.973,43.567 47.973,43.527 48.25,43.25 48.25,39.17 L1.2 47.75,38.67 47.75,37.5 47.75,36.85 47.098,36.198 47.098,35.973 47.025,35.9 B3.5 46.727,35.827 46.502,35.827 46.008,35.333 46.008,34.54 45.92,34.451 45.92,34.241 46.068,34.092 47.382,34.092 48.14,34.85 Q1.2
  Layer 3 w0.254: pad.26@47.75,37.5 49.534,37.5 51.96,39.927 51.96,41.744 52.947,42.731 53.553,42.731 61,35.284 61,33.75 62,32.75 pad.26@62,26.25
  Bottom Layer w0.254: pad.26@42.25,42.75 42.335,42.665 42.619,42.665 47.75,37.534 pad.26@47.75,37.5 ; P2.1@62,24 pad.26@62,26.25
5V_HT: B4.2 B4.5 B5.2 B5.5 C6.1 L2.1 P4.1 pad.26@58,31 pad.26@61.75,35.5 Q2.2 R7.1 | length 31
  Top Layer w0.254: B4.2 58.675,35.5 59.25,34.925 59.25,34.399 59.399,34.25 61.25,34.25 61.75,34.75 pad.26@61.75,35.5 ; B4.5 60.775,36.15 61.425,35.5 pad.26@61.75,35.5 ; R7.1 61,39 62,38 64,38 64.75,38.75 C6.1 L2.1 ; B5.5@64.75,36.223 63.973,36.223 63.303,35.553 62.753,35.553 B5.2 pad.26@61.75,35.5 ; B5.5 64.8,35.649 64.651,35.5 64,35.5 63.75,35.25 63.75,34.75 64.25,34.25 65.19,34.25 66.14,35.2 Q2.2
  Bottom Layer w0.254: P4.1@58,28.75 58,31 58,31.777 58.149,31.926 58.176,31.926 pad.26@61.75,35.5
5V_Reg: B6.2 C7.1 P5.1 pad.26@36.25,36.5 pad.26@64.5,31 | length 52.4
  Top Layer w0.254: B6.2@36.152,42.598 B6.2@36.5,42.25 ; pad.26@36.25,36.5 36.25,37 C7.1 35.25,41 B6.2@36.5,42.25 ; B6.2 B6.2@36.5,42.25
  Layer 3 w0.254: pad.26@36.25,36.5 36.25,36.621 36.011,36.86 36.011,38.513 37.103,39.605 37.139,39.605 38.231,40.697 38.231,44.015 38.697,44.481 46.673,44.481 47.135,44.019 52.983,44.019 58.233,38.769 60.481,38.769 64.5,34.75 pad.26@64.5,31
  Bottom Layer w0.254: P5.1@64.5,28.75 pad.26@64.5,31
5V_USB: B6.3 B6.4 B7.1 C8.1 C12.1 F1.2 J4.15 pad.26@34,41 pad.27 pad.28 Q1.3 Q2.3 R15.2 | length 68.9
  Top Layer w0.254: 1.85,34.16 1.915,34.225 4.935,34.225 C12.1 5.02,34.27 7.53,34.27 R15.2 ; B6.4@29.85,43.225 B6.4 30.348,41.752 30.348,41 34,41 34,41.9 36.152,44.052 36.152,44.202 B6.3@36.5,44.55 ; F1.2 35.25,45.3 35.793,44.757 36.293,44.757 B6.3@36.5,44.55 ; C8.1 38.75,42.252 B7.1 ; B7.1 B7.1 ; Q1.3 pad.27 ; Q2.3 68.4,35.6 pad.28 ; B6.3@36.5,44.55 B6.3 36.8,44.55 38.402,42.948 38.402,42.748 38.65,42.5 B7.1
  Bottom Layer w0.254: pad.26@34,41 35.216,41 38.697,44.481 39.303,44.481 43.634,40.149 43.634,39.582 47.966,35.25 pad.27 56.208,35.25 57.189,36.231 64.436,36.231 65.167,35.5 pad.28
B3_Out: B3.4 B4.1 Q1.1 | length 12.8
  Top Layer w0.254: B3.4 47.025,34.6 49.175,36.75 57.625,36.75 58.225,36.15 B4.1
CS_Mikrobus: J4.3 R9.1 | length 13
  Top Layer w0.254: 24.75,31.62 27.065,29.305 27.065,29.242 27.437,28.87 27.5,28.87 29.206,27.164 29.206,26.035 30.999,24.242 32.079,24.242 32.185,24.348 32.503,24.348 32.905,24.75 R9.1
EN: R17.2 U2.9 U2.20 | length 2
  Top Layer w0.254: R17.2 33.332,28.232 33.782,28.232 U2.9@33.8,28.25
FB: B1.5 C3.1 R4.2 R5.1 | length 4.9
  Top Layer w0.254: C3.1 C3.1@44.185,38.265 ; R4.2 44.185,39.485 C3.1@44.185,38.265 ; B1.5 45.573,40.25 45.55,40.227 R5.1 44.67,38.75 C3.1@44.185,38.265
GND: B1.3 B1.7 B2.2 B3.3 B4.3 B5.3 B6.1 B8.2 B9.1 B9.2 B9.7 B10.MP1 B10.MP2 C2.2 C5.2 C6.2 C7.2 C8.2 C11.2 C12.2 C13.2 C14.2 C15.1 C16.2 C17.1 C18.2 C19.1 C20.1 D3.5 D4.2 D4.4 E1.3 J1.1 J2.1 J3.A1 J3.A12 J3.B1 J3.B12 J3.S1 J3.S2 J3.S3 J3.S4 J4.8 J4.16 J5.4 J5.MP1 J5.MP2 J6.4 J6.MP1 J6.MP2 pad.26@37.25,38 pad.26@46.75,37.5 pad.26@52.5,45.5 pad.26@53.25,41 pad.26@62.492,33.742 pad.26@63.25,38.92 Q3.2 R5.2 R6.2 R8.2 R14.1 R26.2 SW1.1 U2.49 U3.4 | length 180.4
  Top Layer w0.254: J3.S1 23.5,44.525 24.025,44 R26.2 ; J5.4 28.65,10.25 B10.MP1 B10.MP2 ; J5.MP2 37.6,2.85 B10.MP2 ; pad.26@37.25,38 C7.2 36.17,39.602 36.518,39.95 B6.1 36.74,40.04 C8.2 ; B3.3 44.773,34.673 45.423,34.673 45.5,34.75 45.5,36.25 46.75,37.5 46.45,37.8 R5.2 47.5,39.8 47.5,40.75 47,41.25 B1.3@46.25,41.25 ; R6.2 50.05,44.8 50.75,45.5 pad.26@52.5,45.5 ; B1.7@50.687,40.75 51.645,40.75 51.855,40.54 C2.2 52.401,40.691 52.941,40.691 pad.26@53.25,41 ; 52.329,7.75 52.329,4.171 50.031,1.873 43.697,1.873 43.623,1.947 43.623,4.553 43.797,4.727 48.527,4.727 48.8,5 Q3.2 39.8,5.05 B10.MP2 ; B8.2 52.95,9.75 53.277,9.423 ; C17.1 53.033,7.757 51.134,7.757 50.008,8.883 50.008,9.559 50.157,9.708 50.962,9.708 51.315,9.355 51.315,9.287 51.687,8.915 51.755,8.915 51.897,8.773 52.09,8.773 52.271,8.592 52.76,8.592 52.941,8.773 53.203,8.773 ; v2(55.5,7.75) 54.477,8.773 53.797,8.773 53.711,8.86 53.711,8.989 53.277,9.423 ; B4.3 58.607,34.85 58.68,34.777 58.68,34.251 59.188,33.742 62.492,33.742 62.75,34 62.75,34.8 B5.3 ; C19.1 59.492,21.008 58.788,21.008 58.492,20.712 58.492,18.457 59.04,17.909 C20.1 59.548,16.492 60.17,16.492 60.241,16.563 62.274,16.563 62.461,16.75 64.125,16.75 64.125,16.075 63.816,15.766 63.816,14.816 v2(63.75,14.75) ; v2(60.25,11.5) 63.04,11.5 C18.2 63.342,10.302 63.342,8.778 63.448,8.672 63.448,8.385 62.984,7.921 62.984,7.079 63.5,6.563 ; R8.2 62.75,44.25 J2.1 64.75,45.25 B2.2 ; C5.2 62.27,39.52 63.81,39.52 C6.2 pad.26@63.25,38.92 ; v2(65,15.611) 66.028,14.583 67.159,14.583 67.992,13.75 B9.7@67.992,13.25 ; B9.1 66.477,8.527 66.477,7.695 66.102,7.32 65.259,7.32 64.422,6.484 63.579,6.484 63.5,6.563 ; 53.203,8.773 53.452,8.524 53.452,5.643 56.397,2.698 58.403,2.698 58.836,3.131 58.836,3.142 59.269,3.575 D4.4 D4.2 62.738,5.425 63.413,4.75 63.5,4.75 63.5,6.563 ; 53.203,8.773 53.277,8.847 53.277,9.423
  Layer 2 w0.254: v2(60.25,11.5) 60.375,11.5 63.625,14.75 v2(63.75,14.75)
  Layer 3 w0.254: v2(55.5,7.75) 63.361,15.611 v2(65,15.611)
  other v1: 35.05,27.3 36.15,27.3 37.25,27.3 38.35,27.3 39.45,27.3 35.05,28.4 36.15,28.4 37.25,28.4 38.35,28.4 39.45,28.4 35.05,29.5 36.15,29.5 37.25,29.5 38.35,29.5 39.45,29.5 35.05,30.6 36.15,30.6 37.25,30.6 38.35,30.6 39.45,30.6 35.05,31.7 36.15,31.7 37.25,31.7 38.35,31.7 39.45,31.7
  other v3: 2,15.75
LBO: B1.2 R2.2 | length 2
  Top Layer w0.254: R2.2 45.3,42 45.55,41.75 B1.2
MISO_Mikrobus: J4.5 R10.1 | length 18.4
  Top Layer w0.254: 24.742,26.505 25.256,26.034 25.405,25.885 27.698,23.592 27.803,23.592 28.801,23.592 29.675,22.718 32.262,22.718 33.408,21.571 35.092,21.571 35.874,22.354 37.592,22.354 38.322,23.084 38.432,23.084 39.016,23.668 39.016,23.772 39.344,24.1 R10.1
MOSI_Mikrobus: J4.6 R13.1 | length 21.3
  Top Layer w0.254: 24.75,24 27.058,21.692 27.058,20.767 27.647,20.178 30.681,20.178 32.277,21.774 32.487,21.774 33.198,21.063 35.302,21.063 36.085,21.846 37.802,21.846 38.532,22.576 38.642,22.576 39.15,23.084 40.084,23.084 R13.1
NetB1_6: B1.6 pad.26@50,39 pad.26@51.25,44.75 R3.2 R6.1 | length 10.2
  Top Layer w0.254: pad.26@50,39 50.5,39.5 B1.6 ; pad.26@51.25,44.75 50.95,44.45 R6.1 50.975,43.725 52.225,43.725 R3.2
  Bottom Layer w0.254: pad.26@50,39 50,43.5 pad.26@51.25,44.75
NetB1_9: B1.9 L1.1 | length 3.5
  Top Layer w0.254: L1.1 48.758,38.758 48.758,40.558 49.942,41.742 B1.9@50,41.742
NetB1_10: B1.10 C1.1 | length 2.6
  Top Layer w0.254: C1.1 49.927,42.533 49.927,42.273 49.95,42.25 B1.10
NetB2_1: B2.1 C4.1 | length 2.5
  Top Layer w0.254: B2.1 65.7,43.45 65.873,43.277 65.893,43.277 C4.1
NetB2_3: B2.3 R7.2 R8.1 | length 4.8
  Top Layer w0.254: R7.2 R8.1 63.15,43.75 B2.3
NetB4_4: B4.4 B5.1 | length 5.4
  Top Layer w0.254: B4.4 60.325,34.85 60.252,34.923 60.252,35.148 59.75,35.65 59.75,36.5 60,36.75 61.875,36.75 62.475,36.15 B5.1
NetB5_4: B5.4 Q2.1 | length 1.9
  Top Layer w0.254: B5.4 65.025,34.85 65.098,34.923 65.098,34.958 66.14,36 Q2.1
NetB7_2: B7.2 pad.26@28.625,44.975 pad.26@39,43.75 pad.26@51.5,31 R26.1 | length 37.2
  Top Layer w0.254: R26.1 27.525,44.975 pad.26@28.625,44.975 ; pad.26@39,43.75 B7.2
  Layer 2 w0.254: pad.26@28.625,44.975 29.85,43.75 pad.26@39,43.75
  Layer 3 w0.254: pad.26@39,43.75 39.085,43.665 39.085,43.415 49.946,32.554 50.183,32.554 50.778,31.958 50.778,31.722 pad.26@51.5,31
  Bottom Layer w0.254: 39,42.69 pad.26@39,43.75 ; 51.127,29.623 52,28.75 53.5,28.75 ; 51.5,28.75 pad.26@51.5,31
NetB8_1: B8.1 U2.27 | length 30.5
  Top Layer w0.254: U2.27@40.25,27.758 41.131,27.758 v2(41.275,27.614) ; v2(50.25,13.25) 50.444,13.444 51.258,13.444 53.329,15.516 54.171,15.516 54.766,14.921 54.766,14.079 53.792,13.105 53.792,12.374 53.352,11.934 53.352,11.69 53.023,11.361 53.023,10.473 52.95,10.4 B8.1
  Layer 3 w0.254: v2(41.275,27.614) 41.275,22.225 v2(50.25,13.25)
NetB8_3: B8.3 R10.2 R23.1 U2.38 | length 3.7
  Top Layer w0.254: R23.1 51.823,12.023 51.823,9.497 51.897,9.423 52.159,9.423 52.482,9.1 B8.3
NetB8_4: B8.4 R12.2 U2.35
NetB8_5: B8.5 R20.1 U2.13 | length 23.8
  Top Layer w0.254: B8.5 54.05,9.75 53.723,10.077 53.723,10.653 54.194,11.123 54.729,11.123 55.2,11.594 R20.1 56.207,13.257 v3(56.359,13.257)
  Bottom Layer w0.254: 43.437,26.18 v3(56.359,13.257)
NetB9_3: B9.3 R21.1 U2.12 | length 56.2
  Top Layer w0.254: v3(30.211,27.586) 29.714,27.089 29.714,26.245 31.209,24.75 31.869,24.75 32.353,25.234 32.682,25.234 33.272,25.824 33.272,26.297 33.725,26.75 U2.12@33.8,26.75 ; v2(64,7.5) 64.75,8.25 R21.1 65.257,8.493 65.468,8.493 65.883,8.908 65.883,8.962 66.297,9.377 67.223,9.377 67.477,9.123 67.477,8.573 B9.3
  Layer 2 w0.254: v3(30.211,27.586) 30.252,27.544 31.354,27.544 34.279,24.619 34.415,24.619 35.266,23.769 35.266,23.632 38.98,19.918 51.3,19.918 56.437,14.781 56.991,14.781 57.883,13.888 57.883,13.335 59.234,11.984 59.234,11.079 59.829,10.484 61.016,10.484 v2(64,7.5)
NetB9_8: B9.8 B9.10 R22.2 | length 7
  Top Layer w0.254: R22.2 64.358,13.008 ; B9.10 65.447,12.95 65.389,13.008 64.358,13.008 ; B9.8 67.477,12.973 67.477,13.523 67.223,13.777 65.127,13.777 64.358,13.008
NetB10_4: B10.4 D5.2 Q3.3 | length 12.5
  Top Layer w0.254: B10.4 45.3,2.95 Q3.3 49.75,3.1 50.589,3.939 50.661,3.939 51.227,4.506 51.227,6.703 49.5,8.43 D5.2
NetC16_1: C16.1 R16.1 R17.1 SW1.2 | length 8.8
  Top Layer w0.254: SW1.2 31.985,30.595 C16.1 32.25,29.75 32.101,29.601 31.972,29.601 31.848,29.478 31.848,28.652 R16.1 31.848,27.848 31.848,27.466 31.742,27.36 31.742,26.94 31.848,26.834 31.848,26.822 31.922,26.748 31.922,26.578 R17.1
NetC19_2: C19.2 L3.1 U2.2 | length 1.8
  Top Layer w0.254: L3.1 59.04,18.79 59.04,20.46 C19.2
NetC20_2: C20.2 E1.2 L3.2 | length 7.8
  Top Layer w0.254: C20.2 59.94,17.02 59.94,18.73 L3.2 61.051,19.881 64.408,19.881 64.5,19.789 E1.2
NetD1_2: D1.2 DARR2.1 F2.1 | length 7.2
  Top Layer w0.254: D1.2 43.25,44.63 45,46.38 DARR2.1 47.315,46.45 47.765,46.9 F2.1
NetD2_2: D2.2 DARR3.1 F3.1 | length 6.4
  Top Layer w0.254: DARR3.1 57.25,46.13 58.5,44.88 F3.1 59.315,43.5 60.677,44.862 60.677,44.977 60.75,45.05 D2.2
NetD4_1: D4.1 R24.1 | length 6.9
  Top Layer w0.254: D4.1 57.4,12.1 R24.1
NetDARR1_1: DARR1.1 F1.1 | length 2.8
  Top Layer w0.254: DARR1.1 29.87,48.5 30.62,47.75 F1.1
NetJ4_1: J4.1 U2.5 | length 12.6
  Top Layer w0.254: 24.75,36.7 24.75,35.515 24.899,35.366 25.25,35.366 28.293,32.323 31.977,32.323 33.16,31.14 33.16,30.815 33.725,30.25 U2.5@33.8,30.25
NetJ4_2: J4.2 R15.1 U2.23
NetJ4_9: J4.9 U2.14 | length 50.6
  Top Layer w0.254: 1.89,18.92 1.93,18.96 8.71,18.96 v3(8.75,19) ; v3(13.5,19) 17.032,19 21.206,23.174 22.524,23.174 24.142,24.792 24.142,24.897 24.142,24.969 cw(c25.15,25.63) 24.229,26.409 24.233,26.492 24.242,26.751 24.514,27.023 24.725,27.023 24.821,27.007 cw(c24.742,26.505) 24.846,27.003 24.855,27.001 ccw(c25.15,28.17) 25.035,26.97 25.532,26.776 26.336,26.776 26.41,26.701 29.886,23.226 32.5,23.226 32.726,23 32.726,22.972 33.619,22.079 34.881,22.079 35.664,22.862 37.381,22.862 38.111,23.592 38.222,23.592 38.5,23.87 38.5,23.882 38.508,23.89 38.508,25.222 38.328,25.402 37.672,25.402 37.598,25.328 37.598,25.183 37.516,25.101 37.516,24.77 37.065,24.319 36.854,24.319 35.917,25.256 35.719,25.256 34.781,26.194 34.781,26.269 34.75,26.3
  Layer 3 w0.254: v3(8.75,19) v3(13.5,19)
NetJ4_10: J4.10 R14.2 U2.15 | length 2
  Top Layer w0.254: 1.85,21.46 1.87,21.48 3.78,21.48 R14.2
NetP6_1: P6.1 U2.24
NetQ3_1: Q3.1 R25.1 | length 2.7
  Top Layer w0.254: R25.1@49.798,7.3 49.9,7.3 50.7,6.5 Q3.1
NetR9_2: R9.2 U2.34
NetR11_1: R11.1 U1.9
NetR13_2: R13.2 R23.2 U2.36 | length 31.1
  Top Layer w0.254: U2.36@40.2,32.25 49.038,32.25 49.75,31.538 v2(49.762,31.538) ; R23.2 52.95,13.7 v2(53.75,14.5)
  Layer 3 w0.254: v2(49.762,31.538) 49.762,18.488 v2(53.75,14.5)
NetR24_2: R24.2 U2.11
NetR25_2: R25.2 U2.10
NetU1_20: U1.20 U2.41
NetU1_21: U1.21 U2.40
PG: B1.4 R1.2 | length 1.3
  Top Layer w0.254: R1.2 44.92,40.75 44.928,40.758 B1.4@45.5,40.758
PSRAM_CS: U2.29 U3.1 | length 9.8
  Top Layer w0.254: U2.29@40.362,28.637 41.688,28.637 42.969,27.357 48.826,27.357 48.975,27.208 48.975,26.595
SCK_Mikrobus: J4.4 R12.1 | length 16.6
  Top Layer w0.254: 24.75,29.08 30.096,23.734 32.711,23.734 33.234,23.211 33.234,23.183 33.829,22.587 34.671,22.587 35.453,23.37 37.171,23.37 37.901,24.1 R12.1
SCL: B9.5 J4.13 J5.2 J6.2 R18.1 U2.39 | length 134.7
  Top Layer w0.254: 1.85,29.08 10.25,20.68 J6.2@10.25,11.55 ; J6.2 J6.2@10.25,11.55 ; v3(25.5,15.25) 24.55,14.3 J5.2 24.55,9.15 22.892,7.492 8.258,7.492 7.25,8.5 7.25,12.351 7.399,12.5 9,12.5 9.577,11.923 9.877,11.923 J6.2@10.25,11.55 ; 38.75,32.7 38.75,34.1 R18.1@39.65,35 ; R18.1 39.848,34.852 39.848,34.477 40.05,34.275 v3(40.05,34) ; v2(67.5,6.5) 68.5,7.5 B9.5
  Layer 2 w0.254: v3(25.5,15.25) 42.125,15.25 50.875,6.5 62.845,6.5 63.369,5.976 63.806,5.976 64.79,4.992 65.992,4.992 v2(67.5,6.5)
  Layer 3 w0.254: v3(25.5,15.25) 28,17.75 32,17.75 40,25.75 v3@40,34
SCLK: U2.31 U3.6 | length 3.6
  Top Layer w0.254: 40.2,29.734 42.029,29.734 42.374,29.389 42.752,29.389 43.006,29.135 43.525,29.135
SDA: B9.4 J4.14 J5.3 J6.3 R19.1 U2.42 | length 131
  Top Layer w0.254: 1.85,31.62 12.25,21.22 J6.3 12.982,10.35 13.131,10.499 13.131,14.381 21.416,22.666 25.25,22.666 26.55,21.366 26.55,15.05 ; J5.3 26.55,15.05 ; v2(35.25,19) 35.056,19.194 35.056,20.004 34.505,20.555 32.987,20.555 32.741,20.801 30.148,18.208 29.708,18.208 26.55,15.05 ; v3(35.257,34.018) 35.313,34.073 36.273,34.073 R19.1 37.2,32.851 37.25,32.801 37.25,32.7 ; v2(65.75,6.25) 67.016,7.516 67.718,7.516 67.867,7.665 67.867,7.875 67.875,7.875 67.992,7.992 B9.4@67.992,8
  Layer 2 w0.254: v2(35.25,19) 38.492,15.758 54.742,15.758 56.227,14.273 56.78,14.273 57.375,13.678 57.375,13.125 58.726,11.774 58.726,10.869 59.619,9.976 60.524,9.976 62.984,7.516 62.984,7.079 63.579,6.484 64.016,6.484 64.895,5.605 65.105,5.605 v2(65.75,6.25)
  Layer 3 w0.254: v2(32.566,20.626) 33.5,21.56 33.5,22.917 33.234,23.183 33.234,24.024 33.5,24.29 33.5,32.261 v3(35.257,34.018)
SIO0: U2.33 U3.5 | length 3.5
  Top Layer w0.254: U2.33@40.2,30.75 42.661,30.75 43.006,30.405 43.525,30.405
SIO1: U2.16 U3.2 | length 0.4
  Top Layer w0.254: 35.75,26.251 35.75,26.3 ; 48.975,27.865 49.306,27.865
SIO2: U2.32 U3.3 | length 9.2
  Top Layer w0.254: 40.192,30.242 42.239,30.242 42.584,29.897 44.353,29.897 45.115,29.135 48.975,29.135
SIO3: U2.30 U3.7 | length 4
  Top Layer w0.254: 40.065,29.226 41.818,29.226 42.294,28.75 42.64,28.75 43.525,27.865
SW: B2.6 C4.2 L2.2 | length 3.3
  Top Layer w0.254: B2.6 65.7,41.173 65.873,41 C4.2 67.335,40.915 67.335,39.585 L2.2
USB_N: D3.3 J3.A7 J3.B7 pad.26@18.25,38.2 U1.4 | length 28.3
  Top Layer w0.381: D3.3@18.175,32.375 18.209,32.341 18.209,32.175 18.782,31.602 18.782,29.718 U1.4 ; D3.3@18.175,32.475 18.209,32.509 18.606,32.509 18.829,32.733 18.829,37.534 18.25,38.114 18.25,38.2 18.311,38.261 18.538,38.261 18.857,38.58 18.857,39.159 18.858,40.044 18.801,40.1 18.801,40.339 J3.A7 ; J3.B7@19.549,41.689 J3.B7
  Bottom Layer w0.381: pad.26@18.25,38.2 19.15,39.1 20.75,39.1 21.917,37.933 22.233,37.933 24.395,40.095 24.395,42.491 23.835,43.05 20.672,43.05 19.651,42.03 19.651,41.791 J3.B7 J3.B7@19.549,41.689 ; J3.A7 J3.A7@18.801,40.441
USB_P: D3.4 J3.A6 J3.B6 pad.26@20.1,38.2 U1.3 | length 27.7
  Top Layer w0.381: 19.417,29.95 19.417,31.611 19.99,32.184 19.99,32.341 20.025,32.375 20.35,32.375 D3.4 ; J3.A6@19.6,40.317 J3.A6 19.549,40.339 19.549,40.1 19.493,40.044 19.493,38.896 19.492,38.58 19.812,38.261 20.039,38.261 20.1,38.2 20.1,38.114 19.52,37.533 19.52,32.823 19.833,32.509 D3.4@19.99,32.509
  Bottom Layer w0.381: J3.B6@18.801,41.689 J3.B6 18.699,41.791 18.699,42.03 17.714,43.014 14.479,43.014 13.955,42.491 13.955,40.249 16.799,37.405 19.305,37.405 pad.26@20.1,38.2 ; J3.A6@19.549,40.441 J3.A6
VCC_BT: B1.1 B1.8 C2.1 D1.1 F2.2 P1.1 pad.26@53.25,42 pad.26@55.5,26.25 R3.1 | length 42.3
  Top Layer w0.254: B1.1@46.318,42.25 46.295,42.273 45.745,42.273 45.745,42.505 44.95,43.3 44.423,43.3 44.35,43.373 D1.1 44.399,43.549 44.399,44.5 44.5,44.5 45,45 49,45 50.735,46.735 F2.2@50.735,46.967 ; B1.8 50.523,41.273 51.523,41.273 51.708,41.458 52.248,41.458 C2.1 ; F2.2 F2.2@50.735,46.967 ; pad.26@53.25,42 52.79,42 C2.1 ; F2.2@50.735,46.967 51.185,46.517 52.733,46.517 53.5,45.75 53.5,43.25 53.05,42.8 R3.1 C2.1
  Layer 3 w0.254: pad.26@53.25,42 53.284,42 55.5,39.784 pad.26@55.5,26.25
  Bottom Layer w0.254: P1.1@55.5,24 pad.26@55.5,26.25
VCC_HT: B2.4 B2.5 C5.1 D2.1 F3.2 P3.1 pad.26@60,39.5 pad.26@62.5,41.25 pad.26@68.5,26.25 | length 32.5
  Top Layer w0.254: F3.2 F3.2@59.224,40.53 ; pad.26@60,39.5 60,39.754 F3.2@59.224,40.53 ; D2.1 60.75,43.95 60.677,43.877 60.677,43.627 60.25,43.2 60.25,41.465 59.315,40.53 F3.2@59.224,40.53 ; C5.1 62.252,40.462 62.252,41.002 62.5,41.25 B2.4 B2.5
  Layer 3 w0.254: pad.26@62.5,41.25 67.231,36.519 67.231,27.519 pad.26@68.5,26.25
  Bottom Layer w0.254: pad.26@60,39.5 60.085,39.585 60.835,39.585 pad.26@62.5,41.25 ; P3.1@68.5,24 68.5,26 pad.26@68.5,26.25
VDD_SDIO: C15.2 U2.26 U3.8 | length 6
  Top Layer w0.254: U2.26@40.2,27.25 40.249,27.25 40.293,27.206 40.293,27.159 40.577,26.875 40.577,26.873 40.855,26.595 43.95,26.595 44.75,25.795 C15.2
Vin_BT: DARR2.2 J1.2 | length 6.3
  Top Layer w0.254: J1.2 40.816,48.856 44.764,48.856 45,48.62 DARR2.2
Vin_HT: DARR3.2 J2.2 | length 3.4
  Top Layer w0.254: DARR3.2 57.25,48.23 58.23,47.25 J2.2
Vin_USB: B3.1 D3.2 DARR1.2 J3.A4 J3.A9 J3.B4 J3.B9 pad.20 pad.26@44,36.597 | length 55.5
  Top Layer w0.254: J3.A9 J3.B4 17.05,46.8 18.75,48.5 pad.20@25.675,48.5 ; J3.A4 J3.B9 21.3,44.125 pad.20@25.675,48.5 ; DARR1.2 pad.20 pad.20@25.675,48.5 ; pad.26@44,36.597 44,36.443 44.543,35.9 B3.1
  Layer 3 w0.254: pad.20 27.534,48.5 34.731,41.303 34.731,36.985 35.947,35.769 43.172,35.769 pad.26@44,36.597
  Bottom Layer w0.254: J3.B4 17.05,41.794 J3.B4@17.194,41.938 ; pad.20@25.675,48.5 pad.20
pads on no net: D3.1 D4.3 E1.1 E1.4 J3.A5 J3.A8 J3.B5 J3.B8 J4.11 J4.12 U1.1 U1.2 U1.5 U1.6 U1.7 U1.8 U1.10 U1.11 U1.12 U1.13 U1.14 U1.15 U1.16 U1.17 U1.18 U1.19 U1.22 U1.23 U1.24 U1.25 U2.6 U2.7 U2.8 U2.17 U2.18 U2.21 U2.22 U2.25 U2.28 U2.44 U2.45 U2.47 U2.48
copper on no net:
  other v1: 18.55,27.325 19.65,27.325 18.55,28.425 19.65,28.425

## Silkscreen, mask and mechanical layers (free items; w line width, h text height)
Top Overlay:
  lines w0.254: 37.25,35.75 40.5,35.75 40.5,44.25 ; 52.5,35.75 54.75,35.75 ; 54.75,50 54.75,35.75 ; 57,35.75 54.75,35.75
  text "BT" at 52.254,36.504 h1
  text "HT" at 55.504,36.504 h1
  text "USB" at 37.254,36.254 h1
Bottom Overlay:
  text "Conception Elec M1 2024-2025" at 64.746,47.012 h1.52
  text "GROUPE 3" at 64.746,43.754 h1.52

## Text inside footprints (layer, text, board x,y; h text height)
J3: Mechanical 13 "PCB EDGE" at 22.377,47.75 h0.81 r180
Q3: Mechanical 9 "SOT-23" at 51.166,4.25 h0.5 r180